# Altium PCB Test.PcbDoc (part 1 of 2)
Units mil, origin at the board's own origin, x right, y up, seen from the top; angles counter-clockwise.
Board outline 6000 x 4000 mil, 2 copper layers (Top Layer, Bottom Layer); 258 components, 193 nets, 731 pads, 0 vias.
Unrouted connection lines stored in the file: 545.
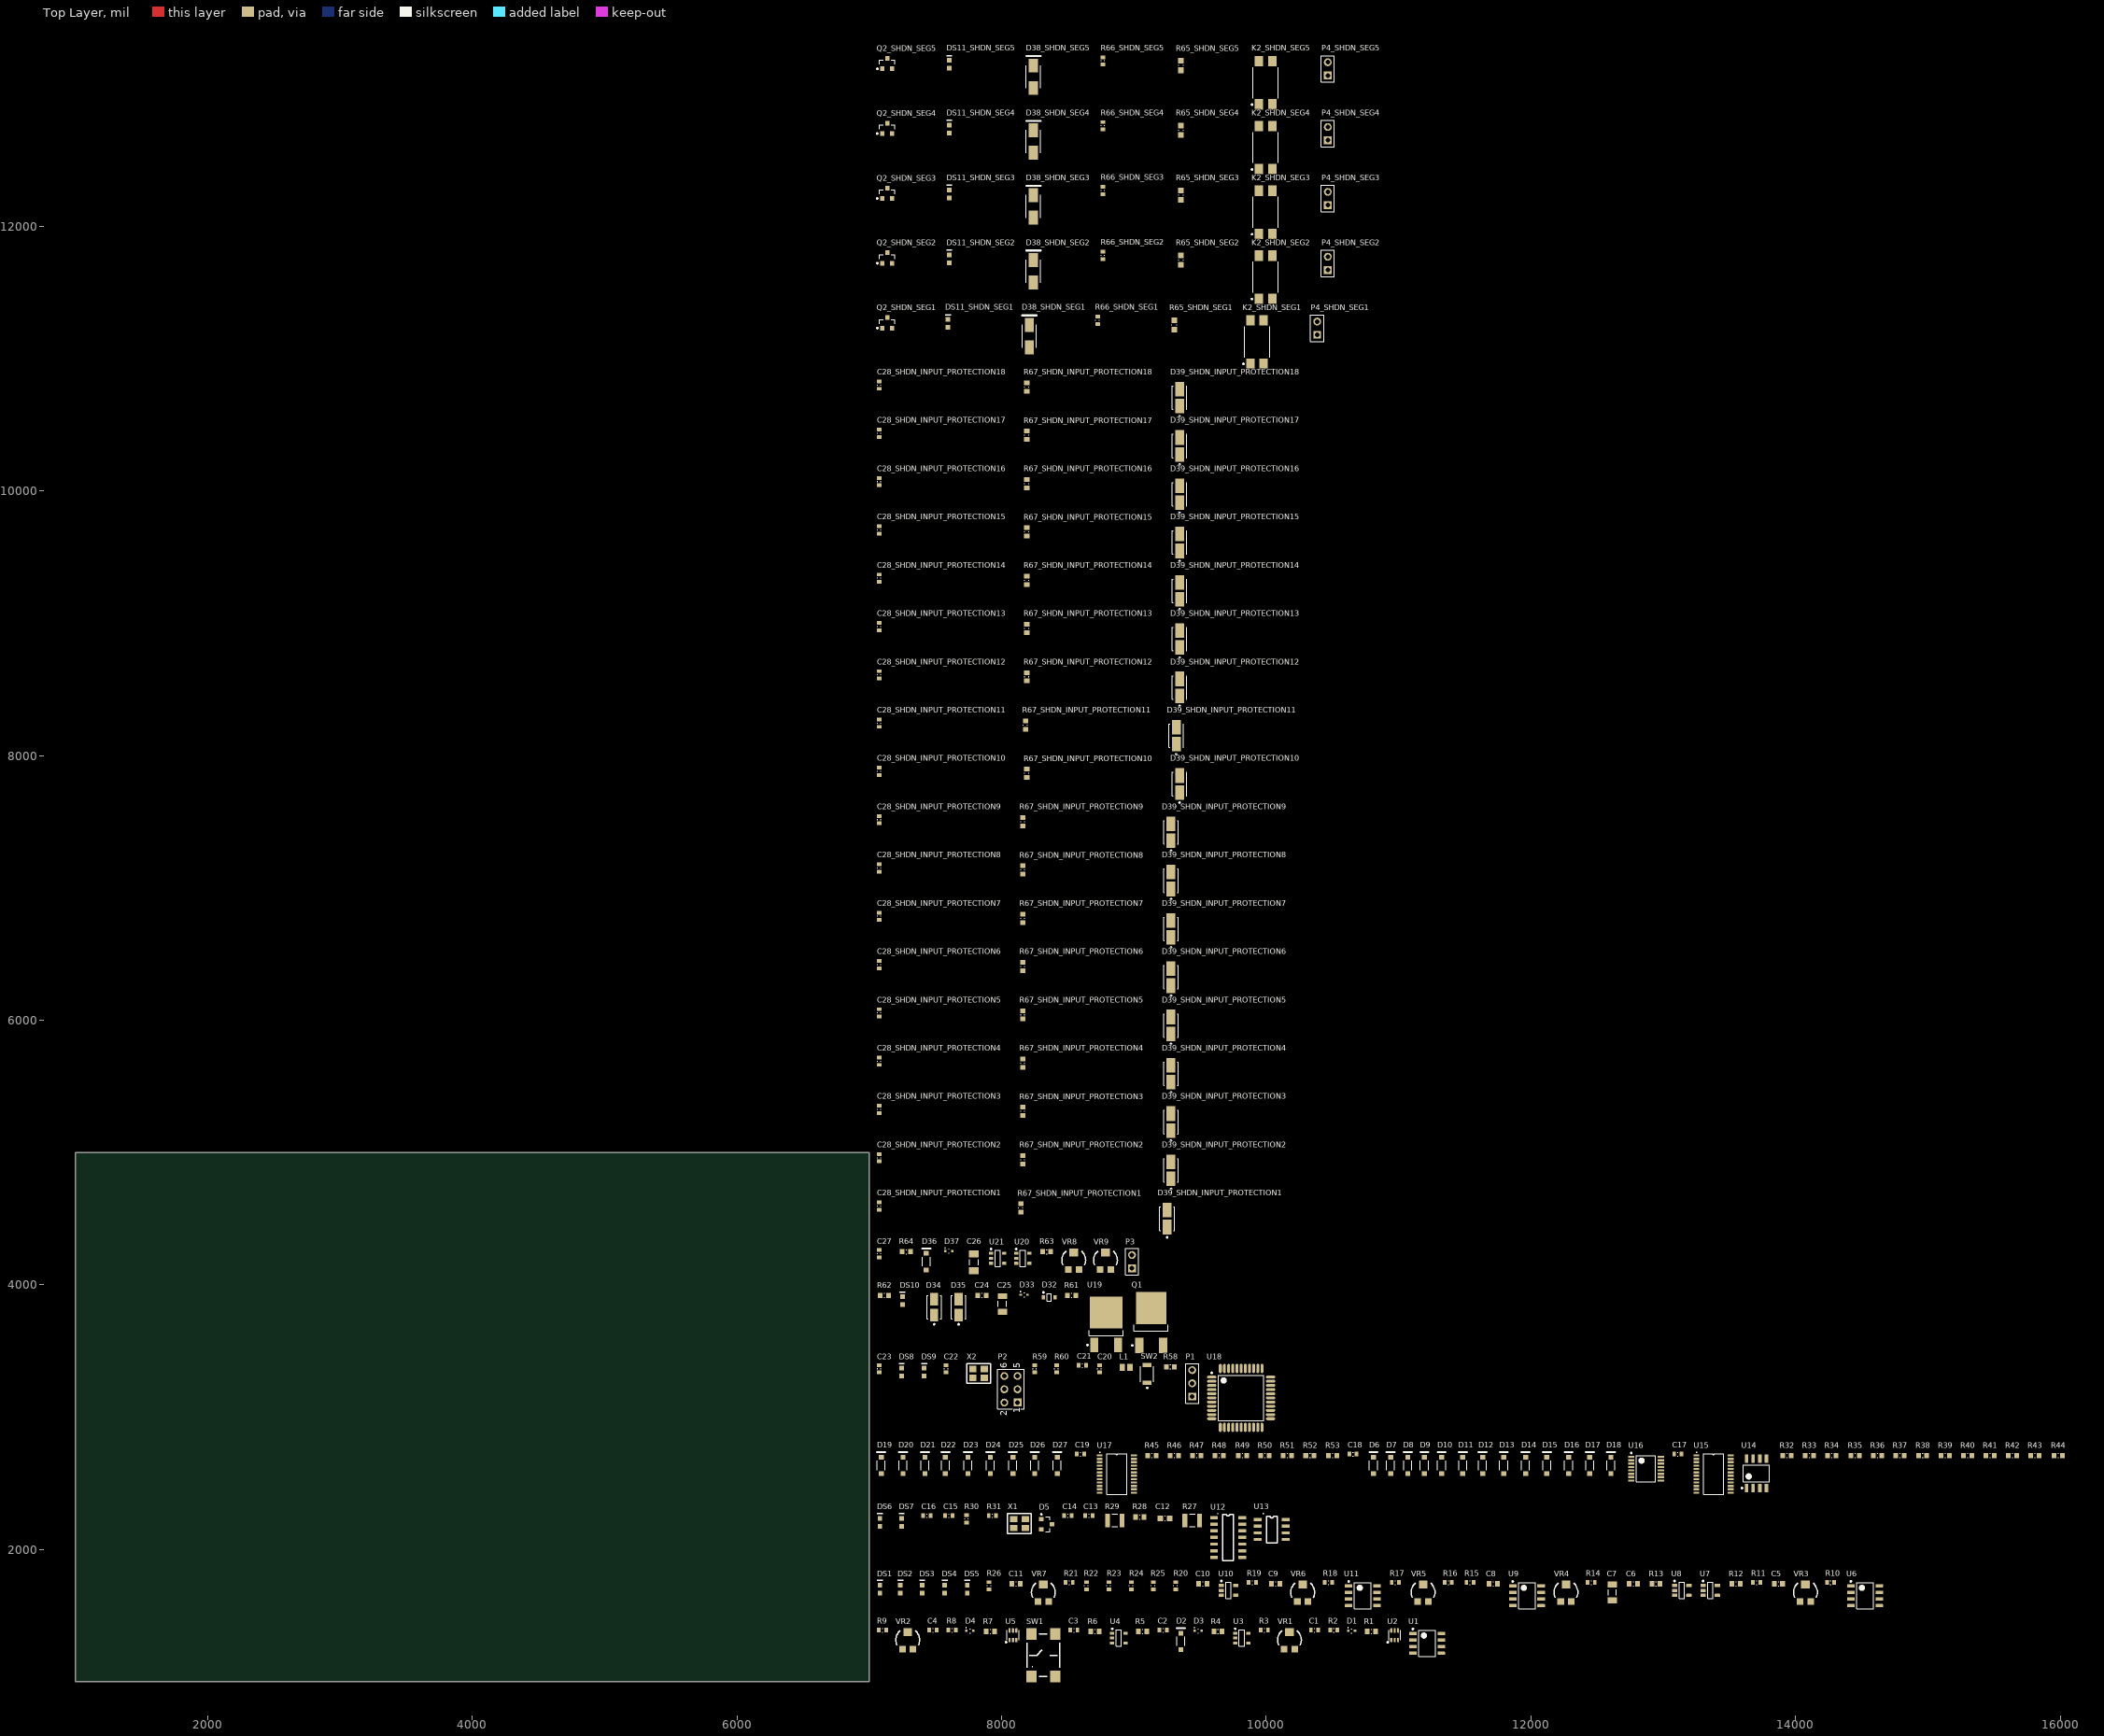
[diagram p0: Top Layer view]
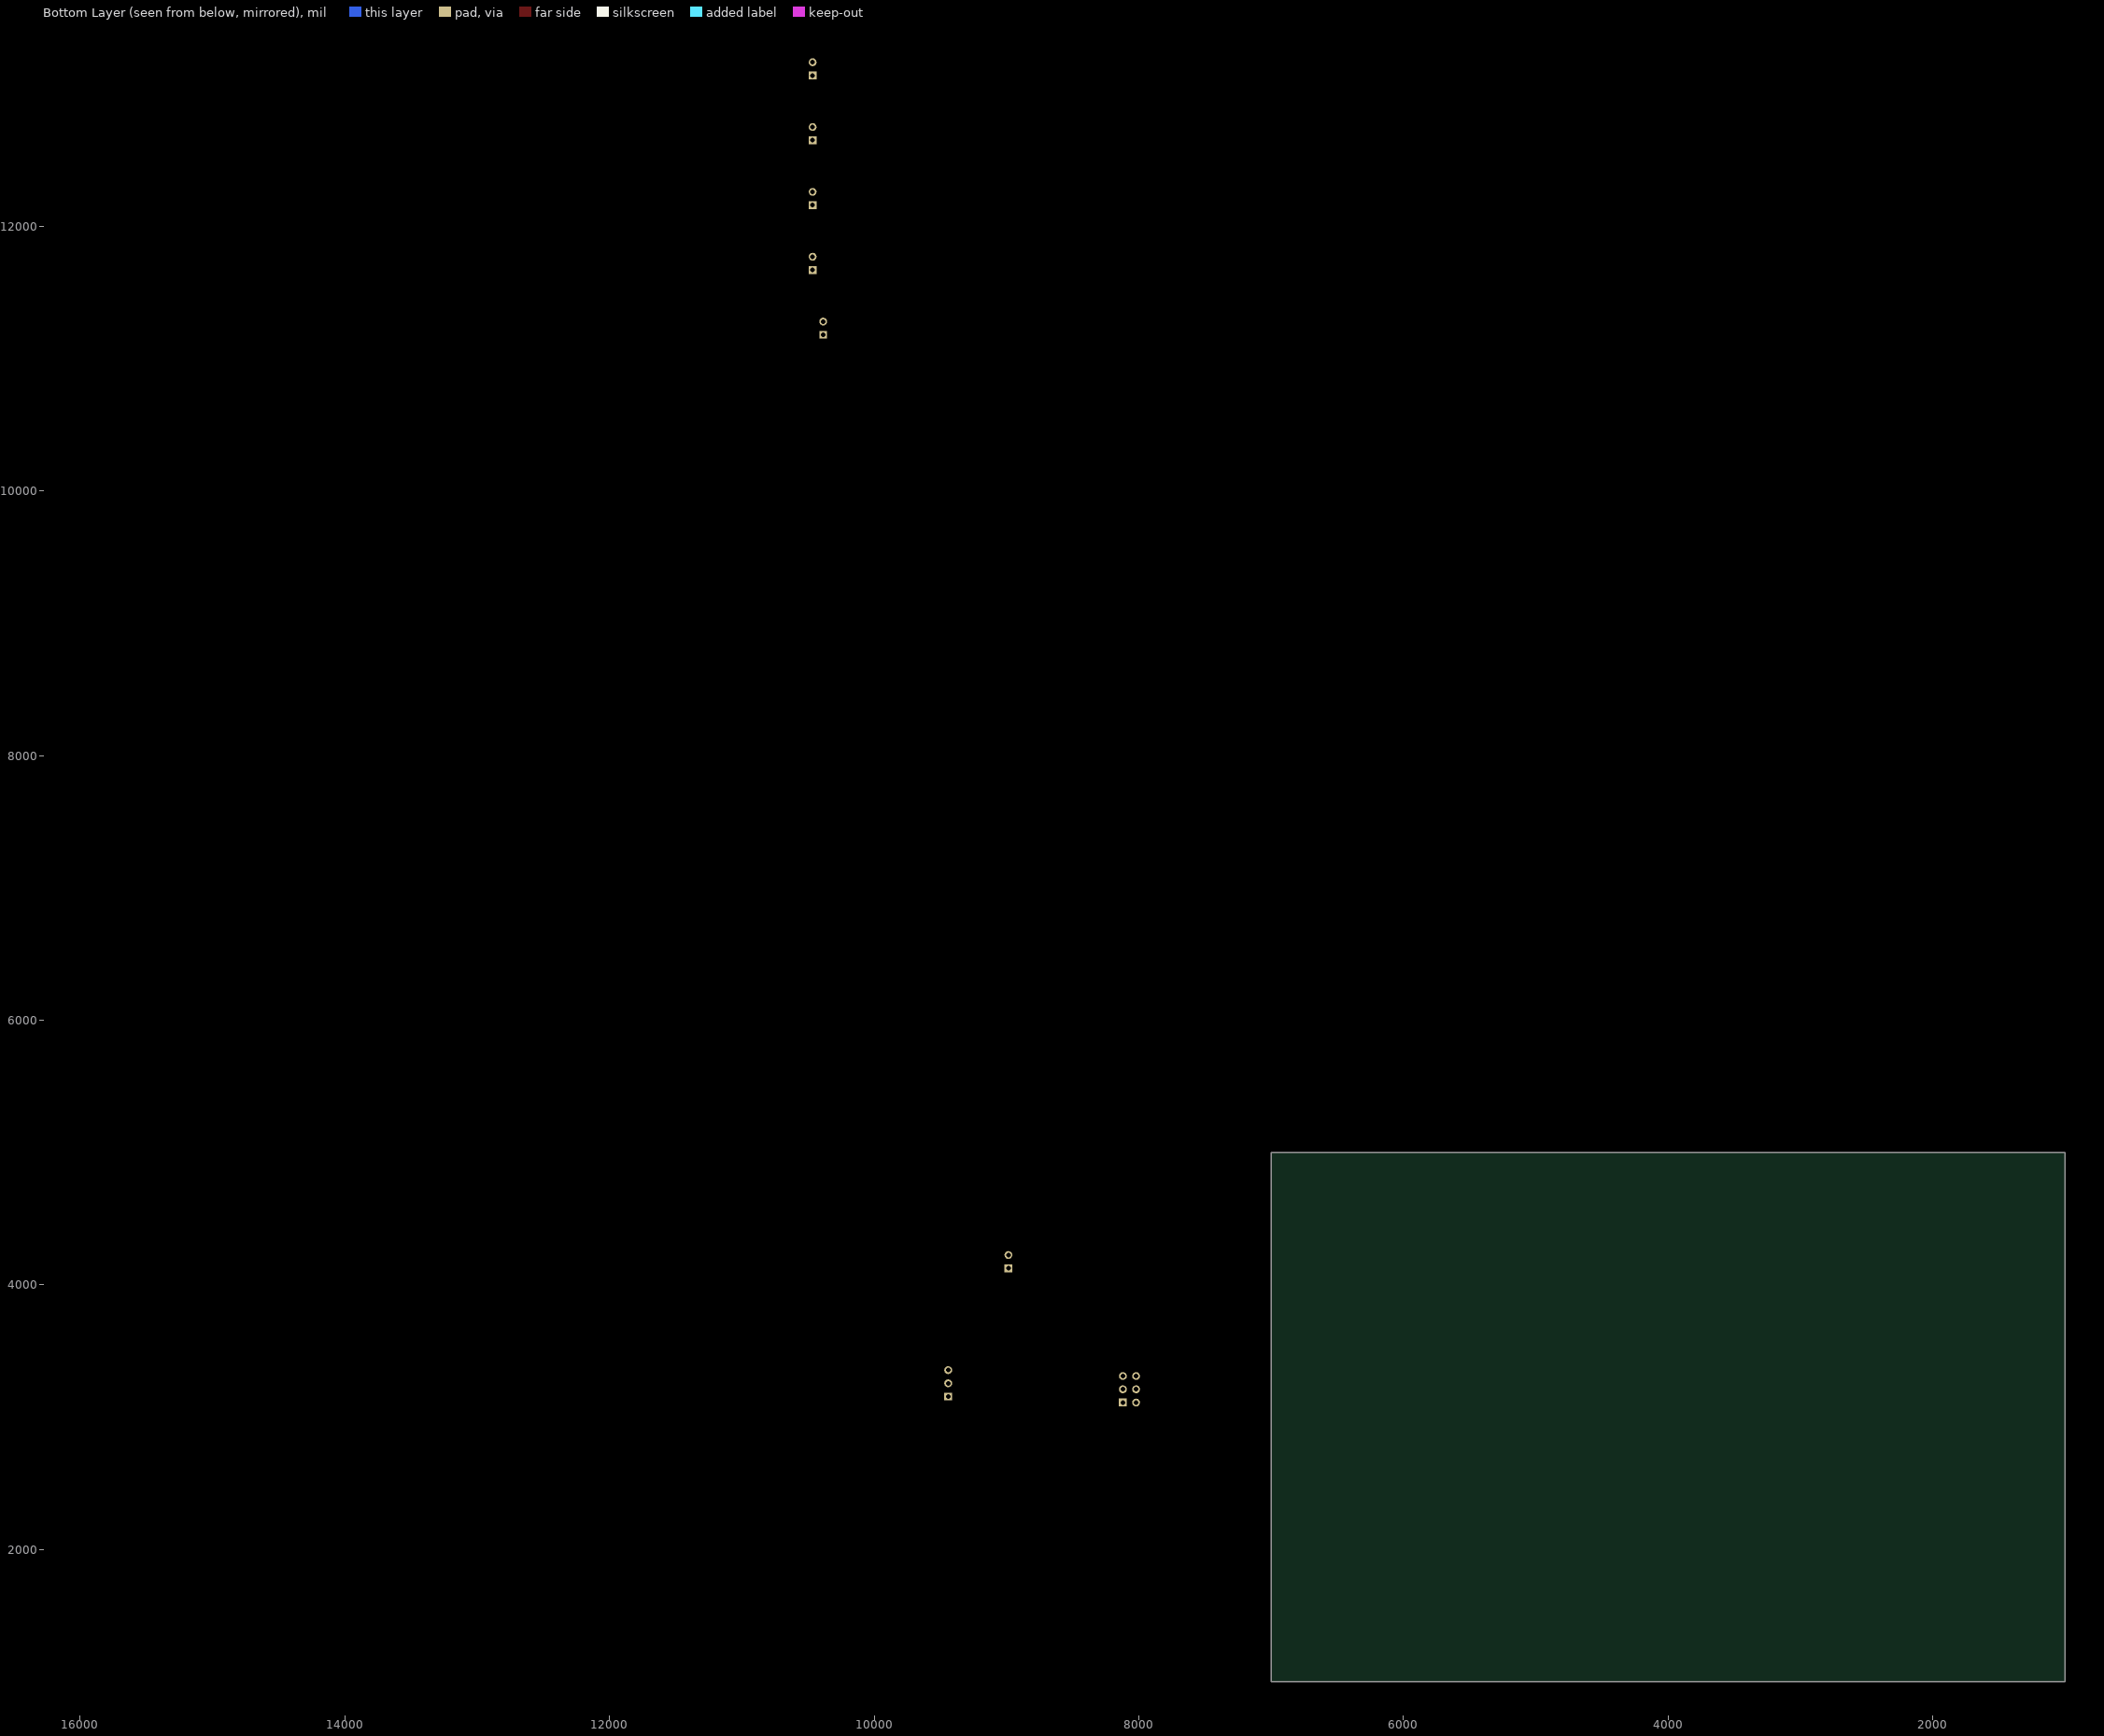
[diagram p1: Bottom Layer view, seen from below]

## Layer stack, top to bottom
Top Solder: solder mask 0.4, Solder Resist, Dk 3.5
Top Layer: signal copper 1.4
Dielectric 1: dielectric 12.6, FR-4, Dk 4.8
Bottom Layer: signal copper 1.4
Bottom Solder: solder mask 0.4, Solder Resist, Dk 3.5

## Board outline
1000,1000 7000,1000 7000,5000 1000,5000

## Design rules (kind name [scope] priority, off if disabled: settings)
Clearance [All] p1: gap=10 ignorepadtopadclearanceinfootprint=FALSE except(0: Arc-Hole Track-Hole SMDPad-Hole THPad-Hole Via-Hole Fill-Hole Poly-Hole Region-Hole Text-Hole)
PolygonConnect [All] p1: connectstyle=Relief reliefconductorwidth=10 reliefentries=4 polygonreliefangle="90 Angle" airgapwidth=10
RoomDefinition SHDN_SEG5 [InComponentClass('SHDN_SEG5')] p1: confinementstyle=ConfineIn formatcopy=TRUE lockcomponents=FALSE outline 7045,12870 10900,12870 10900,13380 7045,13380
RoomDefinition SHDN_SEG4 [InComponentClass('SHDN_SEG4')] p2: confinementstyle=ConfineIn formatcopy=TRUE lockcomponents=FALSE outline 7045,12380 10900,12380 10900,12890 7045,12890
RoomDefinition SHDN_SEG3 [InComponentClass('SHDN_SEG3')] p3: confinementstyle=ConfineIn formatcopy=TRUE lockcomponents=FALSE outline 7045,11890 10900,11890 10900,12400 7045,12400
RoomDefinition SHDN_SEG2 [InComponentClass('SHDN_SEG2')] p4: confinementstyle=ConfineIn formatcopy=TRUE lockcomponents=FALSE outline 7045,11400 10900,11400 10900,11910 7045,11910
RoomDefinition SHDN_SEG1 [InComponentClass('SHDN_SEG1')] p5: confinementstyle=ConfineIn formatcopy=TRUE lockcomponents=FALSE outline 7045,10910 10805,10910 10805,11420 7045,11420
RoomDefinition SHDN_LOOP [InComponentClass('SHDN_LOOP')] p6: confinementstyle=ConfineIn formatcopy=TRUE lockcomponents=FALSE outline 7045,4050 9045,4050 9045,4360 7045,4360
RoomDefinition SHDN_INPUT_PROTECTION18 [InComponentClass('SHDN_INPUT_PROTECTION18')] p7: confinementstyle=ConfineIn formatcopy=TRUE lockcomponents=FALSE outline 7045,10545 10335,10545 10335,10930 7045,10930
RoomDefinition SHDN_INPUT_PROTECTION17 [InComponentClass('SHDN_INPUT_PROTECTION17')] p8: confinementstyle=ConfineIn formatcopy=TRUE lockcomponents=FALSE outline 7045,10180 10335,10180 10335,10565 7045,10565
RoomDefinition SHDN_INPUT_PROTECTION16 [InComponentClass('SHDN_INPUT_PROTECTION16')] p9: confinementstyle=ConfineIn formatcopy=TRUE lockcomponents=FALSE outline 7045,9815 10335,9815 10335,10200 7045,10200
RoomDefinition SHDN_INPUT_PROTECTION15 [InComponentClass('SHDN_INPUT_PROTECTION15')] p10: confinementstyle=ConfineIn formatcopy=TRUE lockcomponents=FALSE outline 7045,9450 10335,9450 10335,9835 7045,9835
RoomDefinition SHDN_INPUT_PROTECTION14 [InComponentClass('SHDN_INPUT_PROTECTION14')] p11: confinementstyle=ConfineIn formatcopy=TRUE lockcomponents=FALSE outline 7045,9085 10335,9085 10335,9470 7045,9470
RoomDefinition SHDN_INPUT_PROTECTION13 [InComponentClass('SHDN_INPUT_PROTECTION13')] p12: confinementstyle=ConfineIn formatcopy=TRUE lockcomponents=FALSE outline 7045,8720 10335,8720 10335,9105 7045,9105
RoomDefinition SHDN_INPUT_PROTECTION12 [InComponentClass('SHDN_INPUT_PROTECTION12')] p13: confinementstyle=ConfineIn formatcopy=TRUE lockcomponents=FALSE outline 7045,8355 10335,8355 10335,8740 7045,8740
RoomDefinition SHDN_INPUT_PROTECTION11 [InComponentClass('SHDN_INPUT_PROTECTION11')] p14: confinementstyle=ConfineIn formatcopy=TRUE lockcomponents=FALSE outline 7045,7990 10295,7990 10295,8375 7045,8375
RoomDefinition SHDN_INPUT_PROTECTION10 [InComponentClass('SHDN_INPUT_PROTECTION10')] p15: confinementstyle=ConfineIn formatcopy=TRUE lockcomponents=FALSE outline 7045,7625 10335,7625 10335,8010 7045,8010
RoomDefinition SHDN_INPUT_PROTECTION9 [InComponentClass('SHDN_INPUT_PROTECTION9')] p16: confinementstyle=ConfineIn formatcopy=TRUE lockcomponents=FALSE outline 7045,7260 10235,7260 10235,7645 7045,7645
RoomDefinition SHDN_INPUT_PROTECTION8 [InComponentClass('SHDN_INPUT_PROTECTION8')] p17: confinementstyle=ConfineIn formatcopy=TRUE lockcomponents=FALSE outline 7045,6895 10235,6895 10235,7280 7045,7280
RoomDefinition SHDN_INPUT_PROTECTION7 [InComponentClass('SHDN_INPUT_PROTECTION7')] p18: confinementstyle=ConfineIn formatcopy=TRUE lockcomponents=FALSE outline 7045,6530 10235,6530 10235,6915 7045,6915
RoomDefinition SHDN_INPUT_PROTECTION6 [InComponentClass('SHDN_INPUT_PROTECTION6')] p19: confinementstyle=ConfineIn formatcopy=TRUE lockcomponents=FALSE outline 7045,6165 10235,6165 10235,6550 7045,6550
RoomDefinition SHDN_INPUT_PROTECTION5 [InComponentClass('SHDN_INPUT_PROTECTION5')] p20: confinementstyle=ConfineIn formatcopy=TRUE lockcomponents=FALSE outline 7045,5800 10235,5800 10235,6185 7045,6185
RoomDefinition SHDN_INPUT_PROTECTION4 [InComponentClass('SHDN_INPUT_PROTECTION4')] p21: confinementstyle=ConfineIn formatcopy=TRUE lockcomponents=FALSE outline 7045,5435 10235,5435 10235,5820 7045,5820
RoomDefinition SHDN_INPUT_PROTECTION3 [InComponentClass('SHDN_INPUT_PROTECTION3')] p22: confinementstyle=ConfineIn formatcopy=TRUE lockcomponents=FALSE outline 7045,5070 10235,5070 10235,5455 7045,5455
RoomDefinition SHDN_INPUT_PROTECTION2 [InComponentClass('SHDN_INPUT_PROTECTION2')] p23: confinementstyle=ConfineIn formatcopy=TRUE lockcomponents=FALSE outline 7045,4705 10235,4705 10235,5090 7045,5090
RoomDefinition SHDN_INPUT_PROTECTION1 [InComponentClass('SHDN_INPUT_PROTECTION1')] p24: confinementstyle=ConfineIn formatcopy=TRUE lockcomponents=FALSE outline 7045,4340 10195,4340 10195,4725 7045,4725
RoomDefinition PWR [InComponentClass('PWR')] p25: confinementstyle=ConfineIn formatcopy=TRUE lockcomponents=FALSE outline 7045,3470 9275,3470 9275,4030 7045,4030
RoomDefinition MCU [InComponentClass('MCU')] p26: confinementstyle=ConfineIn formatcopy=TRUE lockcomponents=FALSE outline 7045,2870 10085,2870 10085,3490 7045,3490
RoomDefinition Demux [InComponentClass('Demux')] p27: confinementstyle=ConfineIn formatcopy=TRUE lockcomponents=FALSE outline 7045,2405 16055,2405 16055,2820 7045,2820
RoomDefinition Connector [InComponentClass('Connector')] p28: confinementstyle=ConfineIn formatcopy=TRUE lockcomponents=FALSE outline 0,0 2000,0 2000,1000 0,1000
RoomDefinition CANBUS [InComponentClass('CANBUS')] p29: confinementstyle=ConfineIn formatcopy=TRUE lockcomponents=FALSE outline 7045,1905 10190,1905 10190,2355 7045,2355
RoomDefinition BSPD_System [InComponentClass('BSPD_System')] p30: confinementstyle=ConfineIn formatcopy=TRUE lockcomponents=FALSE outline 7045,1535 14680,1535 14680,1850 7045,1850
RoomDefinition BSPD_Simulation [InComponentClass('BSPD_Simulation')] p31: confinementstyle=ConfineIn formatcopy=TRUE lockcomponents=FALSE outline 7045,985 11370,985 11370,1490 7045,1490
RoutingVias [All] p1: holewidth=28 width=50 viastyle="Through Hole" minholewidth=28 minwidth=50 maxholewidth=28 maxwidth=50
SolderMaskExpansion [All] p1: expansion=4
Width [All] p1: maxlimit=10 minlimit=10 preferedwidth=10
30 further rules are at their usual default settings.

## Classes and differential pairs
net class STATE_SENSE[1..5]: STATE_SENSE1 STATE_SENSE2 STATE_SENSE3 STATE_SENSE4 STATE_SENSE5
net class SIGNAL_IN[1..18]: SIGNAL_IN1 SIGNAL_IN2 SIGNAL_IN3 SIGNAL_IN4 SIGNAL_IN5 SIGNAL_IN6 SIGNAL_IN7 SIGNAL_IN8 SIGNAL_IN9 SIGNAL_IN10 SIGNAL_IN11 SIGNAL_IN12 SIGNAL_IN13 SIGNAL_IN14 SIGNAL_IN15 SIGNAL_IN16 SIGNAL_IN17 SIGNAL_IN18
component class SHDN_INPUT_PROTECTION18: C28_SHDN_INPUT_PROTECTION18 D39_SHDN_INPUT_PROTECTION18 R67_SHDN_INPUT_PROTECTION18
component class SHDN_INPUT_PROTECTION17: C28_SHDN_INPUT_PROTECTION17 D39_SHDN_INPUT_PROTECTION17 R67_SHDN_INPUT_PROTECTION17
component class SHDN_INPUT_PROTECTION16: C28_SHDN_INPUT_PROTECTION16 D39_SHDN_INPUT_PROTECTION16 R67_SHDN_INPUT_PROTECTION16
component class SHDN_INPUT_PROTECTION15: C28_SHDN_INPUT_PROTECTION15 D39_SHDN_INPUT_PROTECTION15 R67_SHDN_INPUT_PROTECTION15
component class SHDN_INPUT_PROTECTION14: C28_SHDN_INPUT_PROTECTION14 D39_SHDN_INPUT_PROTECTION14 R67_SHDN_INPUT_PROTECTION14
component class SHDN_INPUT_PROTECTION13: C28_SHDN_INPUT_PROTECTION13 D39_SHDN_INPUT_PROTECTION13 R67_SHDN_INPUT_PROTECTION13
component class SHDN_INPUT_PROTECTION12: C28_SHDN_INPUT_PROTECTION12 D39_SHDN_INPUT_PROTECTION12 R67_SHDN_INPUT_PROTECTION12
component class SHDN_INPUT_PROTECTION11: C28_SHDN_INPUT_PROTECTION11 D39_SHDN_INPUT_PROTECTION11 R67_SHDN_INPUT_PROTECTION11
component class SHDN_INPUT_PROTECTION10: C28_SHDN_INPUT_PROTECTION10 D39_SHDN_INPUT_PROTECTION10 R67_SHDN_INPUT_PROTECTION10
component class SHDN_INPUT_PROTECTION9: C28_SHDN_INPUT_PROTECTION9 D39_SHDN_INPUT_PROTECTION9 R67_SHDN_INPUT_PROTECTION9
component class SHDN_INPUT_PROTECTION8: C28_SHDN_INPUT_PROTECTION8 D39_SHDN_INPUT_PROTECTION8 R67_SHDN_INPUT_PROTECTION8
component class SHDN_INPUT_PROTECTION7: C28_SHDN_INPUT_PROTECTION7 D39_SHDN_INPUT_PROTECTION7 R67_SHDN_INPUT_PROTECTION7
component class SHDN_INPUT_PROTECTION6: C28_SHDN_INPUT_PROTECTION6 D39_SHDN_INPUT_PROTECTION6 R67_SHDN_INPUT_PROTECTION6
component class SHDN_INPUT_PROTECTION5: C28_SHDN_INPUT_PROTECTION5 D39_SHDN_INPUT_PROTECTION5 R67_SHDN_INPUT_PROTECTION5
component class PWR: C24 C25 D32 D33 D34 D35 DS10 Q1 R61 R62 U19
component class MCU: C20 C21 C22 C23 DS8 DS9 L1 P1 P2 R58 R59 R60 SW2 U18 X2
component class Demux: C17 C18 C19 D6 D7 D8 D9 D10 D11 D12 D13 D14 D15 D16 D17 D18 D19 D20 D21 D22 D23 D24 D25 D26 D27 R32 R33 R34 R35 R36 R37 R38 R39 R40 R41 R42 R43 R44 R45 R46 R47 R48 R49 R50 R51 R52 R53 U14 U15 U16 U17
component class Connector: J
component class CANBUS: C12 C13 C14 C15 C16 D5 DS6 DS7 R27 R28 R29 R30 R31 U12 U13 X1
channel class 12VInputProtection: SHDN_INPUT_PROTECTION1 SHDN_INPUT_PROTECTION2 SHDN_INPUT_PROTECTION3 SHDN_INPUT_PROTECTION4
component class SHDN_INPUT_PROTECTION4: C28_SHDN_INPUT_PROTECTION4 D39_SHDN_INPUT_PROTECTION4 R67_SHDN_INPUT_PROTECTION4
component class SHDN_INPUT_PROTECTION3: C28_SHDN_INPUT_PROTECTION3 D39_SHDN_INPUT_PROTECTION3 R67_SHDN_INPUT_PROTECTION3
component class SHDN_INPUT_PROTECTION2: C28_SHDN_INPUT_PROTECTION2 D39_SHDN_INPUT_PROTECTION2 R67_SHDN_INPUT_PROTECTION2
component class SHDN_INPUT_PROTECTION1: C28_SHDN_INPUT_PROTECTION1 D39_SHDN_INPUT_PROTECTION1 R67_SHDN_INPUT_PROTECTION1
channel class ShutdownSegement: SHDN_SEG1 SHDN_SEG2 SHDN_SEG3 SHDN_SEG4 SHDN_SEG5
net class STATE_TRIGGER[1..5]: SHDN_TRIGGER1 SHDN_TRIGGER2 SHDN_TRIGGER3 SHDN_TRIGGER4 STATE_TRIGGER5
net class SHDN_OUT[1..5]: SHDN_OUT5
net class SHDN_IN[1..5]: SHDN_IN1 SHDN_IN2 SHDN_IN3 SHDN_IN4 SHDN_IN5
component class SHDN_LOOP: C26 C27 D36 D37 P3 R63 R64 U20 U21 VR8 VR9
component class SHDN_SEG5: D38_SHDN_SEG5 DS11_SHDN_SEG5 K2_SHDN_SEG5 P4_SHDN_SEG5 Q2_SHDN_SEG5 R65_SHDN_SEG5 R66_SHDN_SEG5
component class SHDN_SEG4: D38_SHDN_SEG4 DS11_SHDN_SEG4 K2_SHDN_SEG4 P4_SHDN_SEG4 Q2_SHDN_SEG4 R65_SHDN_SEG4 R66_SHDN_SEG4
component class SHDN_SEG3: D38_SHDN_SEG3 DS11_SHDN_SEG3 K2_SHDN_SEG3 P4_SHDN_SEG3 Q2_SHDN_SEG3 R65_SHDN_SEG3 R66_SHDN_SEG3
component class SHDN_SEG2: D38_SHDN_SEG2 DS11_SHDN_SEG2 K2_SHDN_SEG2 P4_SHDN_SEG2 Q2_SHDN_SEG2 R65_SHDN_SEG2 R66_SHDN_SEG2
component class SHDN_SEG1: D38_SHDN_SEG1 DS11_SHDN_SEG1 K2_SHDN_SEG1 P4_SHDN_SEG1 Q2_SHDN_SEG1 R65_SHDN_SEG1 R66_SHDN_SEG1
component class BSPD_System: C5 C6 C7 C8 C9 C10 C11 DS1 DS2 DS3 DS4 DS5 R10 R11 R12 R13 R14 R15 R16 R17 R18 R19 R20 R21 R22 R23 R24 R25 R26 U6 U7 U8 U9 U10 U11 VR3 VR4 VR5 VR6 VR7
component class BSPD_Simulation: C1 C2 C3 C4 D1 D2 D3 D4 R1 R2 R3 R4 R5 R6 R7 R8 R9 SW1 U1 U2 U3 U4 U5 VR1 VR2

## Components (designator, comment, footprint, x,y, rotation, side; value= is the part's Value field where it differs from the comment)
C1 "CAP 100nF 50V 0603(1608)" CAPC0603(1608)100_L 10365,1390 r0 top value=100nF
C2 "CAP 100nF 50V" CAPC0603(1608)100_L 9220,1390 r0 top value=100nF
C3 "CAP 100nF 50V 0603(1608)" CAPC0603(1608)100_L 8545,1390 r0 top value=100nF
C4 "CAP 100nF 50V 0603(1608)" CAPC0603(1608)100_L 7480,1390 r0 top value=100nF
C5 "CAP 100nF 50V 0603(1608)" CAPC0603(1608)100_N 13870,1740 r0 top value=100nF
C6 "CAP 100nF 50V 0603(1608)" CAPC0603(1608)100_N 12775,1740 r0 top value=100nF
C7 "CAP 10uF 50V 1206(3216)" CAPC1206(3216)190_N 12615,1675 r90 top value=10uF
C8 "CAP 100nF 50V 0603(1608)" CAPC0603(1608)100_N 11715,1740 r0 top value=100nF
C9 "CAP 100nF 50V 0603(1608)" CAPC0603(1608)100_N 10070,1740 r0 top value=100nF
C10 "CAP 100nF 50V 0603(1608)" CAPC0603(1608)100_N 9520,1740 r0 top value=100nF
C11 "CAP 100nF 50V 0603(1608)" CAPC0603(1608)100_N 8110,1740 r0 top value=100nF
C12 "CAP 4.7nF 50V 0603(1608)" CAPC0603(1608)100_M 9235,2235 r0 top value=4.7nF
C13 "CAP 100nF 50V 0603(1608)" CAPC0603(1608)100_L 8660,2255 r0 top value=100nF
C14 "CAP 100nF 50V 0603(1608)" CAPC0603(1608)100_L 8500,2255 r0 top value=100nF
C15 "CAP 18pF 50V 0603(1608)" CAPC0603(1608)100_L 7600,2255 r0 top value=18pF
C16 "CAP 18pF 50V 0603(1608)" CAPC0603(1608)100_L 7435,2255 r0 top value=18pF
C17 "CAP 100nF 50V 0603(1608)" CAPC0603(1608)100_L 13110,2720 r0 top value=100nF
C18 "CAP 100nF 50V 0603(1608)" CAPC0603(1608)100_L 10655,2720 r0 top value=100nF
C19 "CAP 100nF 50V 0603(1608)" CAPC0603(1608)100_L 8595,2720 r0 top value=100nF
C20 "CAP 100nF 50V 0603(1608)" CAPC0603(1608)100_L 8740,3365 r90 top value=100nF
C21 "CAP 100nF 50V 0603(1608)" CAPC0603(1608)100_L 8610,3390 r0 top value=100nF
C22 "CAP 18pF 50V 0603(1608)" CAPC0603(1608)100_L 7580,3365 r90 top value=18pF
C23 "CAP 18pF 50V 0603(1608)" CAPC0603(1608)100_L 7075,3365 r90 top value=18pF
C24 "CAP 100nF 50V 0603(1608)" CAPC0603(1608)100_N 7850,3920 r0 top value=100nF
C25 "CAP 10uF 50V 1206(3216)" CAPC1206(3216)190_N 8005,3855 r90 top value=10uF
C26 "CAP 10uF 50V 1206(3216)" CAPC1206(3216)190_M 7790,4170 r90 top value=10uF
C27 "CAP 100nF 50V" CAPC0603(1608)100_L 7075,4235 r90 top value=100nF
C28_SHDN_INPUT_PROTECTION1 "CAP 100nF 50V 0603(1608)" CAPC0603(1608)100_L 7075,4595 r90 top value=100nF (schematic designator C28)
C28_SHDN_INPUT_PROTECTION2 "CAP 100nF 50V 0603(1608)" CAPC0603(1608)100_L 7075,4960 r90 top value=100nF (schematic designator C28)
C28_SHDN_INPUT_PROTECTION3 "CAP 100nF 50V 0603(1608)" CAPC0603(1608)100_L 7075,5325 r90 top value=100nF (schematic designator C28)
C28_SHDN_INPUT_PROTECTION4 "CAP 100nF 50V 0603(1608)" CAPC0603(1608)100_L 7075,5690 r90 top value=100nF (schematic designator C28)
C28_SHDN_INPUT_PROTECTION5 "CAP 100nF 50V 0603(1608)" CAPC0603(1608)100_L 7075,6055 r90 top value=100nF (schematic designator C28)
C28_SHDN_INPUT_PROTECTION6 "CAP 100nF 50V 0603(1608)" CAPC0603(1608)100_L 7075,6420 r90 top value=100nF (schematic designator C28)
C28_SHDN_INPUT_PROTECTION7 "CAP 100nF 50V 0603(1608)" CAPC0603(1608)100_L 7075,6785 r90 top value=100nF (schematic designator C28)
C28_SHDN_INPUT_PROTECTION8 "CAP 100nF 50V 0603(1608)" CAPC0603(1608)100_L 7075,7150 r90 top value=100nF (schematic designator C28)
C28_SHDN_INPUT_PROTECTION9 "CAP 100nF 50V 0603(1608)" CAPC0603(1608)100_L 7075,7515 r90 top value=100nF (schematic designator C28)
C28_SHDN_INPUT_PROTECTION10 "CAP 100nF 50V 0603(1608)" CAPC0603(1608)100_L 7075,7880 r90 top value=100nF (schematic designator C28)
C28_SHDN_INPUT_PROTECTION11 "CAP 100nF 50V 0603(1608)" CAPC0603(1608)100_L 7075,8245 r90 top value=100nF (schematic designator C28)
C28_SHDN_INPUT_PROTECTION12 "CAP 100nF 50V 0603(1608)" CAPC0603(1608)100_L 7075,8610 r90 top value=100nF (schematic designator C28)
C28_SHDN_INPUT_PROTECTION13 "CAP 100nF 50V 0603(1608)" CAPC0603(1608)100_L 7075,8975 r90 top value=100nF (schematic designator C28)
C28_SHDN_INPUT_PROTECTION14 "CAP 100nF 50V 0603(1608)" CAPC0603(1608)100_L 7075,9340 r90 top value=100nF (schematic designator C28)
C28_SHDN_INPUT_PROTECTION15 "CAP 100nF 50V 0603(1608)" CAPC0603(1608)100_L 7075,9705 r90 top value=100nF (schematic designator C28)
C28_SHDN_INPUT_PROTECTION16 "CAP 100nF 50V 0603(1608)" CAPC0603(1608)100_L 7075,10070 r90 top value=100nF (schematic designator C28)
C28_SHDN_INPUT_PROTECTION17 "CAP 100nF 50V 0603(1608)" CAPC0603(1608)100_L 7075,10435 r90 top value=100nF (schematic designator C28)
C28_SHDN_INPUT_PROTECTION18 "CAP 100nF 50V 0603(1608)" CAPC0603(1608)100_L 7075,10800 r90 top value=100nF (schematic designator C28)
D1 "ESD5Z5.0T1G" ONSC-SOD-523-2-502-01_V 10645,1385 r0 top
D2 "BZT52C5V1-7-F" DIOD-SOD123_V 9355,1305 r90 top
D3 "ESD5Z5.0T1G" ONSC-SOD-523-2-502-01_V 9485,1385 r0 top
D4 "ESD5Z5.0T1G" ONSC-SOD-523-2-502-01_V 7760,1385 r0 top
D5 "NUP2105LT1G" ONSC-SOT-23-3-318-08_V 8340,2190 r0 top
D6 "BZT52C5V1-7-F" DIOD-SOD123_V 10810,2635 r90 top
D7 "BZT52C5V1-7-F" DIOD-SOD123_V 10940,2635 r90 top
D8 "BZT52C5V1-7-F" DIOD-SOD123_V 11070,2635 r90 top
D9 "BZT52C5V1-7-F" DIOD-SOD123_V 11195,2635 r90 top
D10 "BZT52C5V1-7-F" DIOD-SOD123_V 11325,2635 r90 top
D11 "BZT52C5V1-7-F" DIOD-SOD123_V 11485,2635 r90 top
D12 "BZT52C5V1-7-F" DIOD-SOD123_V 11635,2635 r90 top
D13 "BZT52C5V1-7-F" DIOD-SOD123_V 11795,2635 r90 top
D14 "BZT52C5V1-7-F" DIOD-SOD123_V 11960,2635 r90 top
D15 "BZT52C5V1-7-F" DIOD-SOD123_V 12120,2635 r90 top
D16 "BZT52C5V1-7-F" DIOD-SOD123_V 12285,2635 r90 top
D17 "BZT52C5V1-7-F" DIOD-SOD123_V 12445,2635 r90 top
D18 "BZT52C5V1-7-F" DIOD-SOD123_V 12605,2635 r90 top
D19 "BZT52C5V1-7-F" DIOD-SOD123_V 7090,2635 r90 top
D20 "BZT52C5V1-7-F" DIOD-SOD123_V 7255,2635 r90 top
D21 "BZT52C5V1-7-F" DIOD-SOD123_V 7420,2635 r90 top
D22 "BZT52C5V1-7-F" DIOD-SOD123_V 7575,2635 r90 top
D23 "BZT52C5V1-7-F" DIOD-SOD123_V 7745,2635 r90 top
D24 "BZT52C5V1-7-F" DIOD-SOD123_V 7915,2635 r90 top
D25 "BZT52C5V1-7-F" DIOD-SOD123_V 8085,2635 r90 top
D26 "BZT52C5V1-7-F" DIOD-SOD123_V 8250,2635 r90 top
D27 "BZT52C5V1-7-F" DIOD-SOD123_V 8420,2635 r90 top
D32 "MM3Z10VT1G" ONSC-SOD-323-2-477-02_V 8360,3905 r0 top
D33 "ESD5Z5.0T1G" ONSC-SOD-523-2-502-01_V 8170,3925 r0 top
D34 "SMAJ18CA-E3/61" VISH-DO-214AC-2_N 7490,3830 r90 top
D35 "SMAJ18CA-E3/61" VISH-DO-214AC-2_N 7675,3830 r90 top
D36 "BZT52C5V1-7-F" DIOD-SOD123_V 7430,4175 r90 top
D37 "ESD5Z5.0T1G" ONSC-SOD-523-2-502-01_V 7600,4255 r0 top
D38_SHDN_SEG1 "S1M" FAIR-DO-214AC-2_V 8210,11170 r90 top (schematic designator D38)
D38_SHDN_SEG2 "S1M" FAIR-DO-214AC-2_V 8240,11660 r90 top (schematic designator D38)
D38_SHDN_SEG3 "S1M" FAIR-DO-214AC-2_V 8240,12150 r90 top (schematic designator D38)
D38_SHDN_SEG4 "S1M" FAIR-DO-214AC-2_V 8240,12640 r90 top (schematic designator D38)
D38_SHDN_SEG5 "S1M" FAIR-DO-214AC-2_V 8240,13130 r90 top (schematic designator D38)
D39_SHDN_INPUT_PROTECTION1 "SMAJ18CA-E3/61" VISH-DO-214AC-2_M 9250,4500 r90 top (schematic designator D39)
D39_SHDN_INPUT_PROTECTION2 "SMAJ18CA-E3/61" VISH-DO-214AC-2_M 9280,4865 r90 top (schematic designator D39)
D39_SHDN_INPUT_PROTECTION3 "SMAJ18CA-E3/61" VISH-DO-214AC-2_M 9280,5230 r90 top (schematic designator D39)
D39_SHDN_INPUT_PROTECTION4 "SMAJ18CA-E3/61" VISH-DO-214AC-2_M 9280,5595 r90 top (schematic designator D39)
D39_SHDN_INPUT_PROTECTION5 "SMAJ18CA-E3/61" VISH-DO-214AC-2_M 9280,5960 r90 top (schematic designator D39)
D39_SHDN_INPUT_PROTECTION6 "SMAJ18CA-E3/61" VISH-DO-214AC-2_M 9280,6325 r90 top (schematic designator D39)
D39_SHDN_INPUT_PROTECTION7 "SMAJ18CA-E3/61" VISH-DO-214AC-2_M 9280,6690 r90 top (schematic designator D39)
D39_SHDN_INPUT_PROTECTION8 "SMAJ18CA-E3/61" VISH-DO-214AC-2_M 9280,7055 r90 top (schematic designator D39)
D39_SHDN_INPUT_PROTECTION9 "SMAJ18CA-E3/61" VISH-DO-214AC-2_M 9280,7420 r90 top (schematic designator D39)
D39_SHDN_INPUT_PROTECTION10 "SMAJ18CA-E3/61" VISH-DO-214AC-2_M 9345,7785 r90 top (schematic designator D39)
D39_SHDN_INPUT_PROTECTION11 "SMAJ18CA-E3/61" VISH-DO-214AC-2_M 9320,8150 r90 top (schematic designator D39)
D39_SHDN_INPUT_PROTECTION12 "SMAJ18CA-E3/61" VISH-DO-214AC-2_M 9345,8515 r90 top (schematic designator D39)
D39_SHDN_INPUT_PROTECTION13 "SMAJ18CA-E3/61" VISH-DO-214AC-2_M 9345,8880 r90 top (schematic designator D39)
D39_SHDN_INPUT_PROTECTION14 "SMAJ18CA-E3/61" VISH-DO-214AC-2_M 9345,9245 r90 top (schematic designator D39)
D39_SHDN_INPUT_PROTECTION15 "SMAJ18CA-E3/61" VISH-DO-214AC-2_M 9345,9610 r90 top (schematic designator D39)
D39_SHDN_INPUT_PROTECTION16 "SMAJ18CA-E3/61" VISH-DO-214AC-2_M 9345,9975 r90 top (schematic designator D39)
D39_SHDN_INPUT_PROTECTION17 "SMAJ18CA-E3/61" VISH-DO-214AC-2_M 9345,10340 r90 top (schematic designator D39)
D39_SHDN_INPUT_PROTECTION18 "SMAJ18CA-E3/61" VISH-DO-214AC-2_M 9345,10705 r90 top (schematic designator D39)
DS1 "LED Red 0603" "LED RED 0603" 7080,1700 r90 top
DS2 "LED Red 0603" "LED RED 0603" 7235,1700 r90 top
DS3 "LED Red 0603" "LED RED 0603" 7400,1700 r90 top
DS4 "LED Red 0603" "LED RED 0603" 7570,1700 r90 top
DS5 "LED Red 0603" "LED RED 0603" 7740,1700 r90 top
DS6 "LED Blue 0603" "LED BLUE 0603" 7080,2205 r90 top
DS7 "LED Blue 0603" "LED BLUE 0603" 7245,2205 r90 top
DS8 "LED Orange 0603" "LED ORANGE 0603" 7245,3340 r90 top
DS9 "LED Orange 0603" "LED ORANGE 0603" 7415,3340 r90 top
DS10 "LED Green 0603" "LED GREEN 0603" 7250,3880 r90 top
DS11_SHDN_SEG1 "LED Orange 0603" "LED ORANGE 0603" 7595,11265 r90 top (schematic designator DS11)
DS11_SHDN_SEG2 "LED Orange 0603" "LED ORANGE 0603" 7605,11755 r90 top (schematic designator DS11)
DS11_SHDN_SEG3 "LED Orange 0603" "LED ORANGE 0603" 7605,12245 r90 top (schematic designator DS11)
DS11_SHDN_SEG4 "LED Orange 0603" "LED ORANGE 0603" 7605,12735 r90 top (schematic designator DS11)
DS11_SHDN_SEG5 "LED Orange 0603" "LED ORANGE 0603" 7605,13225 r90 top (schematic designator DS11)
K2_SHDN_SEG1 "AQY212EHA" PNSC-DIP4(SMT)_V 9930,11125 r90 top (schematic designator K2)
K2_SHDN_SEG2 "AQY212EHA" PNSC-DIP4(SMT)_V 9995,11615 r90 top (schematic designator K2)
K2_SHDN_SEG3 "AQY212EHA" PNSC-DIP4(SMT)_V 9995,12105 r90 top (schematic designator K2)
K2_SHDN_SEG4 "AQY212EHA" PNSC-DIP4(SMT)_V 9995,12595 r90 top (schematic designator K2)
K2_SHDN_SEG5 "AQY212EHA" PNSC-DIP4(SMT)_V 9995,13085 r90 top (schematic designator K2)
L1 "LQM21FN100M70L" MURA-IND0805_L 8940,3375 r0 top
P1 "Header 3" HDR1X3 9440,3155 r90 top
P2 "Header 3X2" HDR2X3 8120,3110 r90 top
P3 "Header 2" HDR1X2 8985,4125 r90 top
P4_SHDN_SEG1 "Header 2" HDR1X2 10385,11180 r90 top (schematic designator P4)
P4_SHDN_SEG2 "Header 2" HDR1X2 10465,11670 r90 top (schematic designator P4)
P4_SHDN_SEG3 "Header 2" HDR1X2 10465,12160 r90 top (schematic designator P4)
P4_SHDN_SEG4 "Header 2" HDR1X2 10465,12650 r90 top (schematic designator P4)
P4_SHDN_SEG5 "Header 2" HDR1X2 10465,13140 r90 top (schematic designator P4)
Q1 "STD35P6LLF6" ONSC-DPAK-3-369C-01_V 9130,3715 r90 top
Q2_SHDN_SEG1 "NVR5198NLT1G" ONSC-SOT-23-3-318-08_V 7135,11270 r90 top (schematic designator Q2)
Q2_SHDN_SEG2 "NVR5198NLT1G" ONSC-SOT-23-3-318-08_V 7135,11760 r90 top (schematic designator Q2)
Q2_SHDN_SEG3 "NVR5198NLT1G" ONSC-SOT-23-3-318-08_V 7135,12250 r90 top (schematic designator Q2)
Q2_SHDN_SEG4 "NVR5198NLT1G" ONSC-SOT-23-3-318-08_V 7135,12740 r90 top (schematic designator Q2)
Q2_SHDN_SEG5 "NVR5198NLT1G" ONSC-SOT-23-3-318-08_V 7135,13230 r90 top (schematic designator Q2)
R1 "4K7 5% 0603(1608)" RESC0603(1608)_N 10795,1380 r0 top value="4700.00 Ohm"
R2 "DNP" RESC0603(1608)_L 10510,1390 r0 top
R3 "DNP" RESC0603(1608)_L 9985,1390 r0 top
R4 "10K 5% 0603(1608)" RESC0603(1608)_N 9635,1380 r0 top value="10000.00 Ohm"
R5 "4K7 5% 0603(1608)" RESC0603(1608)_N 9065,1380 r0 top value="4700.00 Ohm"
R6 "4K7 5% 0603(1608)" RESC0603(1608)_N 8705,1380 r0 top value="4700.00 Ohm"
R7 "4K7 5% 0603(1608)" RESC0603(1608)_N 7915,1380 r0 top value="4700.00 Ohm"
R8 "DNP" RESC0603(1608)_L 7625,1390 r0 top
R9 "DNP" RESC0603(1608)_L 7100,1390 r0 top
R10 "DNP" RESC0603(1608)_L 14265,1750 r0 top
R11 "DNP" RESC0603(1608)_L 13705,1750 r0 top
R12 "4K7 5% 0603(1608)" RESC0603(1608)_N 13550,1740 r0 top value="4700.00 Ohm"
R13 "68K 5% 0603(1608)" RESC0603(1608)_N 12945,1740 r0 top value="68000.00 Ohm"
R14 "DNP" RESC0603(1608)_L 12455,1750 r0 top
R15 "DNP" RESC0603(1608)_L 11540,1750 r0 top
R16 "DNP" RESC0603(1608)_L 11375,1750 r0 top
R17 "DNP" RESC0603(1608)_L 10975,1750 r0 top
R18 "DNP" RESC0603(1608)_L 10470,1750 r0 top
R19 "DNP" RESC0603(1608)_L 9895,1750 r0 top
R20 "DNP" RESC0603(1608)_L 9315,1725 r90 top
R21 "1K 5% 0603(1608)" RESC0603(1608)_L 8510,1750 r0 top value="1000.00 Ohm"
R22 "1K 5% 0603(1608)" RESC0603(1608)_L 8640,1725 r90 top value="1000.00 Ohm"
R23 "1K 5% 0603(1608)" RESC0603(1608)_L 8810,1725 r90 top value="1000.00 Ohm"
R24 "1K 5% 0603(1608)" RESC0603(1608)_L 8980,1725 r90 top value="1000.00 Ohm"
R25 "1K 5% 0603(1608)" RESC0603(1608)_L 9145,1725 r90 top value="1000.00 Ohm"
R26 "DNP" RESC0603(1608)_L 7905,1725 r90 top
R27 "60R4 1% 1210(3225)" RESC1210(3225)_L 9440,2220 r0 top value="60.40 Ohm"
R28 "300R 5% 0603(1608)" RESC0603(1608)_N 9045,2245 r0 top value="300.00 Ohm"
R29 "60R4 1% 1210(3225)" RESC1210(3225)_L 8855,2220 r0 top value="60.40 Ohm"
R30 "1K 5% 0603(1608)" RESC0603(1608)_L 7735,2230 r90 top value="1000.00 Ohm"
R31 "1K 5% 0603(1608)" RESC0603(1608)_L 7930,2255 r0 top value="1000.00 Ohm"
R32 "10K" RESC0603(1608)_N 13935,2710 r0 top value="10000.00 Ohm"
R33 "10K" RESC0603(1608)_N 14105,2710 r0 top value="10000.00 Ohm"
R34 "10K" RESC0603(1608)_N 14275,2710 r0 top value="10000.00 Ohm"
R35 "10K" RESC0603(1608)_N 14450,2710 r0 top value="10000.00 Ohm"
R36 "10K" RESC0603(1608)_N 14620,2710 r0 top value="10000.00 Ohm"
R37 "10K" RESC0603(1608)_N 14790,2710 r0 top value="10000.00 Ohm"
R38 "10K" RESC0603(1608)_N 14960,2710 r0 top value="10000.00 Ohm"
R39 "10K" RESC0603(1608)_N 15130,2710 r0 top value="10000.00 Ohm"
R40 "10K" RESC0603(1608)_N 15300,2710 r0 top value="10000.00 Ohm"
R41 "10K" RESC0603(1608)_N 15470,2710 r0 top value="10000.00 Ohm"
R42 "10K" RESC0603(1608)_N 15640,2710 r0 top value="10000.00 Ohm"
R43 "10K" RESC0603(1608)_N 15810,2710 r0 top value="10000.00 Ohm"
R44 "10K" RESC0603(1608)_N 15985,2710 r0 top value="10000.00 Ohm"
R45 "10K" RESC0603(1608)_N 9135,2710 r0 top value="10000.00 Ohm"
R46 "10K" RESC0603(1608)_N 9305,2710 r0 top value="10000.00 Ohm"
R47 "10K" RESC0603(1608)_N 9475,2710 r0 top value="10000.00 Ohm"
R48 "10K" RESC0603(1608)_N 9645,2710 r0 top value="10000.00 Ohm"
R49 "10K" RESC0603(1608)_N 9820,2710 r0 top value="10000.00 Ohm"
R50 "10K" RESC0603(1608)_N 9990,2710 r0 top value="10000.00 Ohm"
R51 "10K" RESC0603(1608)_N 10160,2710 r0 top value="10000.00 Ohm"
R52 "10K" RESC0603(1608)_N 10330,2710 r0 top value="10000.00 Ohm"
R53 "10K" RESC0603(1608)_N 10500,2710 r0 top value="10000.00 Ohm"
R58 "10K 5% 0603(1608)" RESC0603(1608)_N 9275,3380 r0 top value="10000.00 Ohm"
R59 "1K 5% 0603(1608)" RESC0603(1608)_L 8250,3365 r90 top value="1000.00 Ohm"
R60 "1K 5% 0603(1608)" RESC0603(1608)_L 8415,3365 r90 top value="1000.00 Ohm"
R61 "1K 5% 0603(1608)" RESC0603(1608)_N 8530,3920 r0 top value="1000.00 Ohm"
R62 "100K 5% 0603(1608)" RESC0603(1608)_N 7115,3920 r0 top value="100000.00 Ohm"
R63 "10K 5% 0603(1608)" RESC0603(1608)_N 8340,4250 r0 top value="10000.00 Ohm"
R64 "4K7 5% 0603(1608)" RESC0603(1608)_N 7280,4250 r0 top value="4700.00 Ohm"
R65_SHDN_SEG1 "2K7 5% 0603(1608)" RESC0603(1608)_M 9305,11255 r90 top value="2700.00 Ohm" (schematic designator R65)
R65_SHDN_SEG2 "2K7 5% 0603(1608)" RESC0603(1608)_M 9355,11745 r90 top value="2700.00 Ohm" (schematic designator R65)
R65_SHDN_SEG3 "2K7 5% 0603(1608)" RESC0603(1608)_M 9355,12235 r90 top value="2700.00 Ohm" (schematic designator R65)
R65_SHDN_SEG4 "2K7 5% 0603(1608)" RESC0603(1608)_M 9355,12725 r90 top value="2700.00 Ohm" (schematic designator R65)
R65_SHDN_SEG5 "2K7 5% 0603(1608)" RESC0603(1608)_M 9355,13215 r90 top value="2700.00 Ohm" (schematic designator R65)
R66_SHDN_SEG1 "1K 5% 0603(1608)" RESC0603(1608)_L 8725,11290 r90 top value="1000.00 Ohm" (schematic designator R66)
R66_SHDN_SEG2 "1K 5% 0603(1608)" RESC0603(1608)_L 8765,11780 r90 top value="1000.00 Ohm" (schematic designator R66)
R66_SHDN_SEG3 "1K 5% 0603(1608)" RESC0603(1608)_L 8765,12270 r90 top value="1000.00 Ohm" (schematic designator R66)
R66_SHDN_SEG4 "1K 5% 0603(1608)" RESC0603(1608)_L 8765,12760 r90 top value="1000.00 Ohm" (schematic designator R66)
R66_SHDN_SEG5 "1K 5% 0603(1608)" RESC0603(1608)_L 8765,13250 r90 top value="1000.00 Ohm" (schematic designator R66)
R67_SHDN_INPUT_PROTECTION1 "4K7 5% 0603(1608)" RESC0603(1608)_N 8145,4580 r90 top value="4700.00 Ohm" (schematic designator R67)
R67_SHDN_INPUT_PROTECTION2 "4K7 5% 0603(1608)" RESC0603(1608)_N 8160,4945 r90 top value="4700.00 Ohm" (schematic designator R67)
R67_SHDN_INPUT_PROTECTION3 "4K7 5% 0603(1608)" RESC0603(1608)_N 8160,5310 r90 top value="4700.00 Ohm" (schematic designator R67)
R67_SHDN_INPUT_PROTECTION4 "4K7 5% 0603(1608)" RESC0603(1608)_N 8160,5675 r90 top value="4700.00 Ohm" (schematic designator R67)
R67_SHDN_INPUT_PROTECTION5 "4K7 5% 0603(1608)" RESC0603(1608)_N 8160,6040 r90 top value="4700.00 Ohm" (schematic designator R67)
R67_SHDN_INPUT_PROTECTION6 "4K7 5% 0603(1608)" RESC0603(1608)_N 8160,6405 r90 top value="4700.00 Ohm" (schematic designator R67)
R67_SHDN_INPUT_PROTECTION7 "4K7 5% 0603(1608)" RESC0603(1608)_N 8160,6770 r90 top value="4700.00 Ohm" (schematic designator R67)
R67_SHDN_INPUT_PROTECTION8 "4K7 5% 0603(1608)" RESC0603(1608)_N 8160,7135 r90 top value="4700.00 Ohm" (schematic designator R67)
R67_SHDN_INPUT_PROTECTION9 "4K7 5% 0603(1608)" RESC0603(1608)_N 8160,7500 r90 top value="4700.00 Ohm" (schematic designator R67)
R67_SHDN_INPUT_PROTECTION10 "4K7 5% 0603(1608)" RESC0603(1608)_N 8190,7865 r90 top value="4700.00 Ohm" (schematic designator R67)
R67_SHDN_INPUT_PROTECTION11 "4K7 5% 0603(1608)" RESC0603(1608)_N 8180,8230 r90 top value="4700.00 Ohm" (schematic designator R67)
R67_SHDN_INPUT_PROTECTION12 "4K7 5% 0603(1608)" RESC0603(1608)_N 8190,8595 r90 top value="4700.00 Ohm" (schematic designator R67)
R67_SHDN_INPUT_PROTECTION13 "4K7 5% 0603(1608)" RESC0603(1608)_N 8190,8960 r90 top value="4700.00 Ohm" (schematic designator R67)
R67_SHDN_INPUT_PROTECTION14 "4K7 5% 0603(1608)" RESC0603(1608)_N 8190,9325 r90 top value="4700.00 Ohm" (schematic designator R67)
R67_SHDN_INPUT_PROTECTION15 "4K7 5% 0603(1608)" RESC0603(1608)_N 8190,9690 r90 top value="4700.00 Ohm" (schematic designator R67)
R67_SHDN_INPUT_PROTECTION16 "4K7 5% 0603(1608)" RESC0603(1608)_N 8190,10055 r90 top value="4700.00 Ohm" (schematic designator R67)
R67_SHDN_INPUT_PROTECTION17 "4K7 5% 0603(1608)" RESC0603(1608)_N 8190,10420 r90 top value="4700.00 Ohm" (schematic designator R67)
R67_SHDN_INPUT_PROTECTION18 "4K7 5% 0603(1608)" RESC0603(1608)_N 8190,10785 r90 top value="4700.00 Ohm" (schematic designator R67)
SW1 "Standard SMD BTN" StandardSMDBTN 8315,1200 r90 top
SW2 "B3U-1000P" OMRON-B3U-1000_V 9100,3325 r90 top
U1 "LM358AM" D0008A_N 11215,1290 r0 top
U2 "NC7SZ157P6X" FAIR-SC70-6_V 10945,1315 r0 top
U3 "SN74LVC1G17DBVR" DBV0005A_L 9815,1330 r0 top
U4 "SN74AHC1G14DBVR" DBV0005A_L 8885,1330 r0 top
U5 "NC7SZ157P6X" FAIR-SC70-6_V 8060,1315 r0 top
U6 "LM358AM" D0008A_N 14525,1650 r0 top
U7 "SN74AHC1G08DBVR" DBV0005A_N 13355,1690 r0 top
U8 "SN74AHC1G08DBVR" DBV0005A_N 13140,1690 r0 top
U9 "LM358AM" D0008A_N 11970,1650 r0 top
U10 "SN74AHC1G08DBVR" DBV0005A_N 9715,1690 r0 top
U11 "LM358AM" D0008A_N 10730,1650 r0 top
U12 "MCP2518FD" "MCP2517FD SOIC" 9605,2240 r0 top
U13 "MCP2561" "MCP2561 SOIC" 9935,2225 r0 top
U14 "LM358AM" D0008A_M 13705,2575 r90 top
U15 "74HC4067" "74HC4067 TSSOP24" 13250,2710 r0 top
U16 "SN74HC595PWR" PW0016A_L 12870,2610 r0 top
U17 "74HC4067" "74HC4067 TSSOP24" 8740,2710 r0 top
U18 "ATmega1284P-AU" 44A_N 9810,3145 r0 top
U19 "L78M05CDT" STM-TO252-3_A_V 8790,3700 r90 top
U20 "SN74AHC1G02DBVR" DBV0005A_L 8160,4200 r0 top
U21 "SN74AHC1G02DBVR" DBV0005A_L 7970,4200 r0 top
VR1 "4.7k Variable Resistor" VG039NCHXTB472 10175,1315 r0 top
VR2 "4.7k Variable Resistor" VG039NCHXTB472 7290,1315 r0 top
VR3 "4.7k Variable Resistor" VG039NCHXTB472 14075,1675 r0 top
VR4 "4.7k Variable Resistor" VG039NCHXTB472 12265,1675 r0 top
VR5 "4.7k Variable Resistor" VG039NCHXTB472 11185,1675 r0 top
VR6 "4.7k Variable Resistor" VG039NCHXTB472 10275,1675 r0 top
VR7 "4.7k Variable Resistor" VG039NCHXTB472 8315,1675 r0 top
VR8 "500k Variable Resistor" VG039NCHXTB472 8545,4185 r0 top
VR9 "4.7k Variable Resistor" VG039NCHXTB472 8785,4185 r0 top
X1 "XTAL_20Mz_3.2mm*2.5mm" 3.2mm*2.5mm 8135,2195 r0 top
X2 "XTAL_16Mz_3.2mm*2.5mm" 3.2mm*2.5mm 7825,3330 r0 top

## Footprints (in the part's own frame and the unit in brackets; to place one, negate y for a bottom-side part, rotate by r counter-clockwise, add the part's x,y. Pads: shape width x height; smd on the part's side, far side on the other; paste and mask are expansions set on the pad)
3.2mm*2.5mm [mm]
  rect 1.4x1.2 smd: 1(-1.1,-0.85) 2(1.1,-0.85) 3(1.1,0.85) 4(-1.1,0.85)
  silkscreen extent -2.29,-1.91 2.29,1.91, body extent -1.6,-1.25 1.6,1.25, height 0.8
44A_N [mm] "Thin QFP, 44-Leads, Body 10x10mm, Pitch 0.8mm, IPC Medium Density"
  oval 1.75x0.55 smd: 1(-5.65,4) 2(-5.65,3.2) 3(-5.65,2.4) 4(-5.65,1.6) 5(-5.65,0.8) 6(-5.65,0) 7(-5.65,-0.8) 8(-5.65,-1.6) 9(-5.65,-2.4) 10(-5.65,-3.2) 11(-5.65,-4) 23(5.65,-4) 24(5.65,-3.2) 25(5.65,-2.4) 26(5.65,-1.6) 27(5.65,-0.8) 28(5.65,0) 29(5.65,0.8) 30(5.65,1.6) 31(5.65,2.4) 32(5.65,3.2) 33(5.65,4)
  oval 0.55x1.75 smd: 12(-4,-5.65) 13(-3.2,-5.65) 14(-2.4,-5.65) 15(-1.6,-5.65) 16(-0.8,-5.65) 17(0,-5.65) 18(0.8,-5.65) 19(1.6,-5.65) 20(2.4,-5.65) 21(3.2,-5.65) 22(4,-5.65) 34(4,5.65) 35(3.2,5.65) 36(2.4,5.65) 37(1.6,5.65) 38(0.8,5.65) 39(0,5.65) 40(-0.8,5.65) 41(-1.6,5.65) 42(-2.4,5.65) 43(-3.2,5.65) 44(-4,5.65)
  silkscreen extent -5.77,-4.35 4.35,4.95, body extent -5,-5 5,5, height 1.2
"74HC4067 TSSOP24" [mil]
  rect 45x16 smd: 1(0,0) 2(0,-25.59) 3(0,-51.18) 4(0,-76.77) 5(0,-102.36) 6(0,-127.95) 7(0,-153.54) 8(0,-179.13) 9(0,-204.72) 10(0,-230.32) 11(0,-255.91) 12(0,-281.5) 13(259.84,-281.5) 14(259.84,-255.91) 15(259.84,-230.32) 16(259.84,-204.72) 17(259.84,-179.13) 18(259.84,-153.54) 19(259.84,-127.95) 20(259.84,-102.36) 21(259.84,-76.77) 22(259.84,-51.18) 23(259.84,-25.59) 24(259.84,0)
  silkscreen extent 0,-294 205,25, body extent 4,-295 256,12, height 41
CAPC0603(1608)100_L [mm] "Chip Capacitor, Body 1.6x0.8mm, Height 1.0mm, IPC High Density"
  rect 0.7x0.9 smd: 1(-0.7,0) 2(0.7,0)
  silkscreen extent -0.05,-0.35 0.05,0.35, body extent -0.87,-0.47 0.88,0.48, height 1
CAPC0603(1608)100_M [mm] "Chip Capacitor, Body 1.6x0.8mm, Height 1.0mm, IPC Low Density"
  rect 1.1x1.1 smd: 1(-0.9,0) 2(0.9,0)
  silkscreen extent -0.05,-0.45 0.05,0.45, body extent -0.87,-0.47 0.88,0.48, height 1
CAPC0603(1608)100_N [mm] "Chip Capacitor, Body 1.6x0.8mm, Height 1.0mm, IPC Medium Density"
  rect 0.9x1 smd: 1(-0.8,0) 2(0.8,0)
  silkscreen extent -0.05,-0.4 0.05,0.4, body extent -0.87,-0.48 0.88,0.47, height 1
CAPC1206(3216)190_M [mm] "Chip Capacitor, Body 3.2x1.6mm, Height 1.9mm, IPC Low Density"
  rect 1.35x1.9 smd: 1(-1.6,0) 2(1.6,0)
  silkscreen extent -0.55,-0.85 0.55,0.85, body extent -1.7,-0.9 1.7,0.9, height 1.9
CAPC1206(3216)190_N [mm] "Chip Capacitor, Body 3.2x1.6mm, Height 1.9mm, IPC Medium Density"
  rect 1.15x1.8 smd: 1(-1.5,0) 2(1.5,0)
  silkscreen extent -0.55,-0.8 0.55,0.8, body extent -1.7,-0.9 1.7,0.9, height 1.9
D0008A_M [mm] "SOIC, 8-Leads, Body 5x4mm, Pitch 1.27mm, IPC Low Density"
  rrect15% 1.65x0.65 smd: 1(-2.825,1.905) 2(-2.825,0.635) 3(-2.825,-0.635) 4(-2.825,-1.905) 5(2.825,-1.905) 6(2.825,-0.635) 7(2.825,0.635) 8(2.825,1.905)
  silkscreen extent -2.95,-2.5 1.6,2.9, body extent -3,-2.45 3,2.45, height 1.63
D0008A_N [mm] "SOIC, 8-Leads, Body 5x4mm, Pitch 1.27mm, IPC Medium Density"
  rrect17% 1.45x0.6 smd: 1(-2.725,1.905) 2(-2.725,0.635) 3(-2.725,-0.635) 4(-2.725,-1.905) 5(2.725,-1.905) 6(2.725,-0.635) 7(2.725,0.635) 8(2.725,1.905)
  silkscreen extent -2.85,-2.5 1.6,2.88, body extent -3,-2.45 3,2.45, height 1.63
DBV0005A_L [mm] "SOT23, 5-Leads, Body 3.05x1.75mm, Pitch 0.95mm, IPC High Density"
  rrect18% 0.8x0.55 smd: 1(-1.275,0.95) 2(-1.275,0) 3(-1.275,-0.95) 4(1.275,-0.95) 5(1.275,0.95)
  silkscreen extent -1.4,-1.55 0.5,1.9, body extent -1.42,-1.46 1.42,1.46, height 1.08
DBV0005A_N [mm] "SOT23, 5-Leads, Body 3.05x1.75mm, Pitch 0.95mm, IPC Medium Density"
  rrect17% 1x0.6 smd: 1(-1.375,0.95) 2(-1.375,0) 3(-1.375,-0.95) 4(1.375,-0.95) 5(1.375,0.95)
  silkscreen extent -1.5,-1.55 0.5,1.92, body extent -1.42,-1.46 1.42,1.46, height 1.08
DIOD-SOD123_V [mm] "SMD, 2-Leads, Body 2.7x1.55mm"
  rect 0.9x0.95 smd: 1(-1.575,0) 2(1.575,0)
  silkscreen extent -0.86,-0.77 2.52,0.77, body extent -1.35,-0.77 1.35,0.77, height 1.41
FAIR-DO-214AC-2_V [mm] "DO-214, 2-Leads, Body 4.375x2.725mm"
  rect 2.65x1.75 smd: 1(-2.15,0) 2(2.15,0)
  silkscreen extent -2.19,-1.36 3.98,1.36, body extent -2.19,-1.36 2.19,1.36, height 2.5
FAIR-SC70-6_V [mm] "SC70, 6-Leads, Body 2x1.25mm, Pitch 0.65mm"
  rrect50% 0.4x0.85 smd: 1(0,0) 2(0.65,0) 3(1.3,0) 4(1.3,1.85) 5(0.65,1.85) 6(0,1.85)
  silkscreen extent -0.8,-0.55 1.8,1.85, body extent -0.43,-0.38 1.73,2.22, height 1.1
HDR1X2 [mm] "Connector; Header; 2 Position"
  rect 1.5x1.5 hole 0.9: 1(0,0)
  round 1.5 hole 0.9: 2(2.54,0)
  silkscreen extent -1.27,-1.27 3.81,1.27
HDR1X3 [mm] "Connector; Header; 3 Position"
  rect 1.5x1.5 hole 0.9: 1(0,0)
  round 1.5 hole 0.9: 2(2.54,0) 3(5.08,0)
  silkscreen extent -1.27,-1.27 6.35,1.27
HDR2X3 [mm] "Connector; Header; 3x2 Position"
  rect 1.5x1.5 hole 0.9: 1(0,0)
  round 1.5 hole 0.9: 2(0,2.54) 3(2.54,0) 4(2.54,2.54) 5(5.08,0) 6(5.08,2.54)
  silkscreen extent -1.27,-1.27 6.35,3.81
"LED BLUE 0603" [mil]
  rect 35x35 smd: 1(-30,0) 2(30,0)
  silkscreen extent 65,-20 65,20, body extent -40,-20 40,20, height 30
"LED GREEN 0603" [mil]
  rect 35x35 smd: 1(-30,0) 2(30,0)
  silkscreen extent 65,-20 65,20, body extent -40,-20 40,20, height 30
"LED ORANGE 0603" [mil]
  rect 35x35 smd: 1(-30,0) 2(30,0)
  silkscreen extent 65,-20 65,20, body extent -40,-20 40,20, height 30
"LED RED 0603" [mil]
  rect 35x35 smd: 1(-30,0) 2(30,0)
  silkscreen extent 65,-20 65,20, body extent -40,-20 40,20, height 30
"MCP2517FD SOIC" [mm]
  rect 1.5x0.6 smd: 1(0,0) 2(0,-1.27) 3(0,-2.54) 4(0,-3.81) 5(0,-5.08) 6(0,-6.35) 7(0,-7.62) 8(5.4,-7.62) 9(5.4,-6.35) 10(5.4,-5.08) 11(5.4,-3.81) 12(5.4,-2.54) 13(5.4,-1.27) 14(5.4,0)
  silkscreen extent 0.64,-8.25 3.76,0.76, body extent 0.74,-8.13 4.64,0.52, height 1.74
"MCP2561 SOIC" [mm]
  rect 1.55x0.6 smd: 1(0,0) 2(0,-1.27) 3(0,-2.54) 4(0,-3.81) 5(5.4,-3.81) 6(5.4,-2.54) 7(5.4,-1.27) 8(5.4,0)
  silkscreen extent 1.02,-4.44 3.74,1.14, body extent 0.51,-4.38 4.64,0.52, height 1.65
MURA-IND0805_L [mm] "Chip Inductor, 2-Leads, Body 2.2x1.45mm, IPC High Density"
  rect 0.99x1.39 smd: 1(-0.755,0) 2(0.755,0)
  body extent -1.1,-0.72 1.1,0.72, height 1.45
OMRON-B3U-1000_V [mm] "SMD, 2-Leads, Body 3x2.5mm"
  rect 0.8x1.7 smd: 1(-1.7,0) 2(1.7,0)
  silkscreen extent -2.77,-1.25 1.5,1.25, body extent -1.5,-1.25 1.5,1.25, height 1.75
ONSC-DPAK-3-369C-01_V [mm] "DPAK, 3-Leads, Body 6.54x6.095mm, Pitch 2.29mm"
  rect 3x1.6 smd: 1(-4.4,2.29) 3(-4.4,-2.29)
  rect 6.2x5.8 smd: 4(2.8,0)
  silkscreen extent -4.52,-3.27 -0.45,3.76, body extent -1.6,-3.27 4.49,3.27, height 2.38
ONSC-SOD-323-2-477-02_V [mm] "SOD, 2-Leads, Body 1.7x1.25mm"
  rect 0.63x0.83 smd: 1(-1.115,0) 2(1.115,0)
  silkscreen extent -1.24,-0.67 0.4,1.09, body extent -0.85,-0.63 0.85,0.63, height 1.06
ONSC-SOD-523-2-502-01_V [mm] "SOD, 2-Leads, Body 1.2x0.8mm"
  rect 0.48x0.4 smd: 1(-0.66,0) 2(0.66,0)
  silkscreen extent -0.75,-0.4 0.07,0.65, body extent -0.6,-0.4 0.6,0.4, height 0.7
ONSC-SOT-23-3-318-08_V [mm] "SOT23, 3-Leads, Body 2.92x1.3mm, Pitch 0.95mm"
  rect 0.9x0.8 smd: 1(-1,0.95) 2(-1,-0.95) 3(1,0)
  silkscreen extent -1.12,-1.46 0.65,2.02, body extent -0.65,-1.46 0.65,1.46, height 1.11
PNSC-DIP4(SMT)_V [mm] "DIP(SMT), 4-Leads, Body 6.4x4.78mm, Pitch 2.54mm"
  rect 2x1.6 smd: 1(-4.15,1.27) 2(-4.15,-1.27) 3(4.15,-1.27) 4(4.15,1.27)
  silkscreen extent -4.31,-2.42 2.95,2.74, body extent -3.22,-2.41 3.22,2.41, height 3
PW0016A_L [mm] "SOP, 16-Leads, Body 5.1x4.5mm, Pitch 0.65mm, IPC High Density"
  rrect25% 1.2x0.4 smd: 1(-2.85,2.275) 2(-2.85,1.625) 3(-2.85,0.975) 4(-2.85,0.325) 5(-2.85,-0.325) 6(-2.85,-0.975) 7(-2.85,-1.625) 8(-2.85,-2.275) 9(2.85,-2.275) 10(2.85,-1.625) 11(2.85,-0.975) 12(2.85,-0.325) 13(2.85,0.325) 14(2.85,0.975) 15(2.85,1.625) 16(2.85,2.275)
  silkscreen extent -2.97,-2.55 1.85,3.15, body extent -3.21,-2.5 3.21,2.5, height 1
RESC0603(1608)_L [mm]
  rect 0.7x0.9 smd: 1(-0.7,0) 2(0.7,0)
  silkscreen extent -0.05,-0.35 0.05,0.35, body extent -0.85,-0.47 0.85,0.47, height 0.6
RESC0603(1608)_M [mm] "Chip Resistor, Body 1.6x0.8mm, IPC Low Density"
  rect 1.1x1.1 smd: 1(-0.9,0) 2(0.9,0)
  silkscreen extent -0.05,-0.45 0.05,0.45, body extent -0.85,-0.47 0.85,0.47, height 0.6
RESC0603(1608)_N [mm] "Chip Resistor, Body 1.6x0.8mm, IPC Medium Density"
  rect 0.9x1 smd: 1(-0.8,0) 2(0.8,0)
  silkscreen extent -0.05,-0.4 0.05,0.4, body extent -0.85,-0.47 0.85,0.47, height 0.6
RESC1210(3225)_L [mm] "Chip Resistor, Body 3.2x2.5mm, IPC High Density"
  rect 0.95x2.6 smd: 1(-1.4,0) 2(1.4,0)
  silkscreen extent -0.55,-1.2 0.55,1.2, body extent -1.7,-1.35 1.7,1.35, height 0.71
StandardSMDBTN [mil] "https://lcsc.com/product-detail/Tactile-Switches_BRIGHT-TSA063G50-250_C294565.html"
  rect 90x80 smd: 1(-160,90) 2(160,90) 3(-160,-90) 4(160,-90)
  silkscreen extent -160,-125 160,125, body extent -120,-120 120,120, height 205
STM-TO252-3_A_V [mm] "D-PAK, 3-Leads, Body 6.20x6.60mm, Pitch 2.28mm"
  rect 2.8x1.5 smd: 1(-3.95,2.28) 3(-3.95,-2.28)
  rect 6.1x6.3 smd: 4(2.3,0)
  silkscreen extent -4.07,-3.3 -1.15,3.7, body extent -3.37,-3.3 6.35,3.3, height 2.43
VG039NCHXTB472 [mil] "VG039NCHXTB472"
  rect 50x50 smd: 1(40,-70) 3(-40,-70)
  rect 65x60 smd: 2(0,60)
  silkscreen extent -90,-38 90,69, body extent -60,-75 60,75, height 50
VISH-DO-214AC-2_M [mm] "DO-214AC, 2-Leads, Body 4.5x2.79mm, IPC Low Density"
  rect 2.8x1.7 smd: 1(-1.625,0) 2(1.625,0)
  silkscreen extent -3.7,-1.4 2.25,1.4, body extent -2.25,-1.39 2.25,1.4, height 2.29
VISH-DO-214AC-2_N [mm] "DO-214AC, 2-Leads, Body 4.5x2.79mm, IPC Medium Density"
  rect 2.4x1.55 smd: 1(-1.525,0) 2(1.525,0)
  silkscreen extent -3.4,-1.4 2.25,1.4, body extent -2.25,-1.4 2.25,1.39, height 2.29